# EAGLE board SISTEM MINIMUM ATMEGA16 MODEL 2 (EAGLE 5.06)
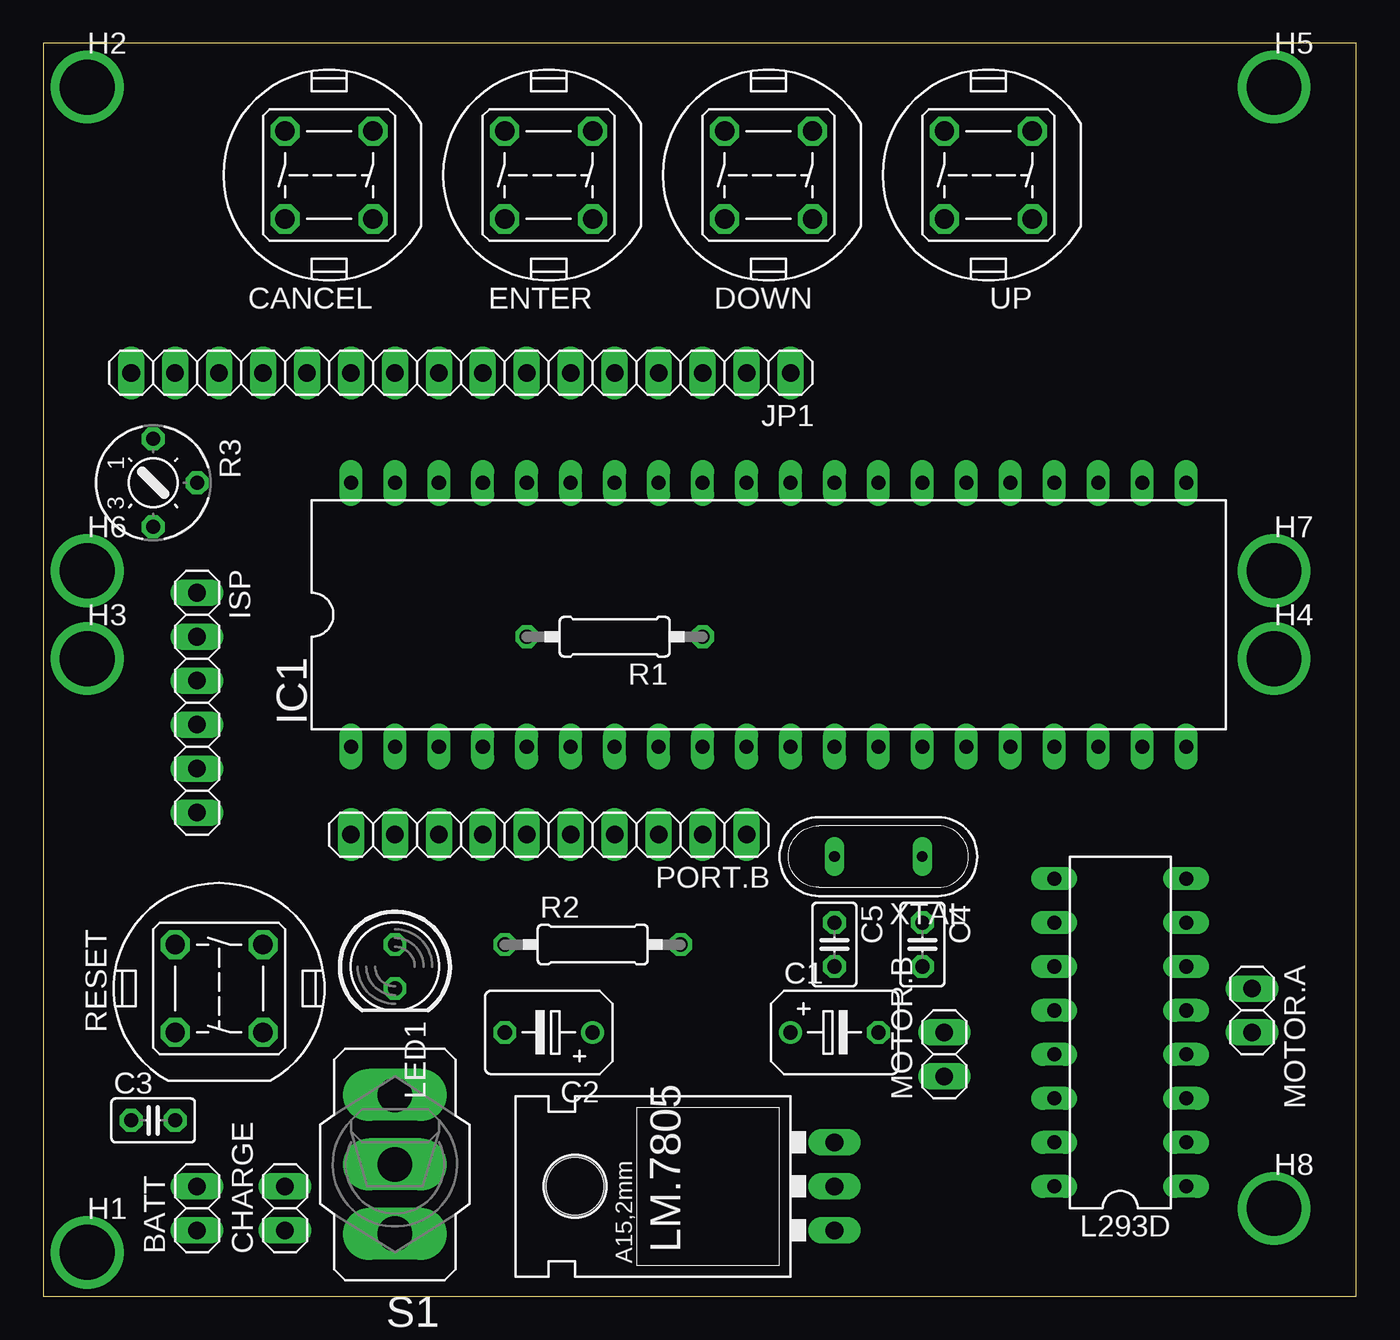
[diagram p0: board, top side]
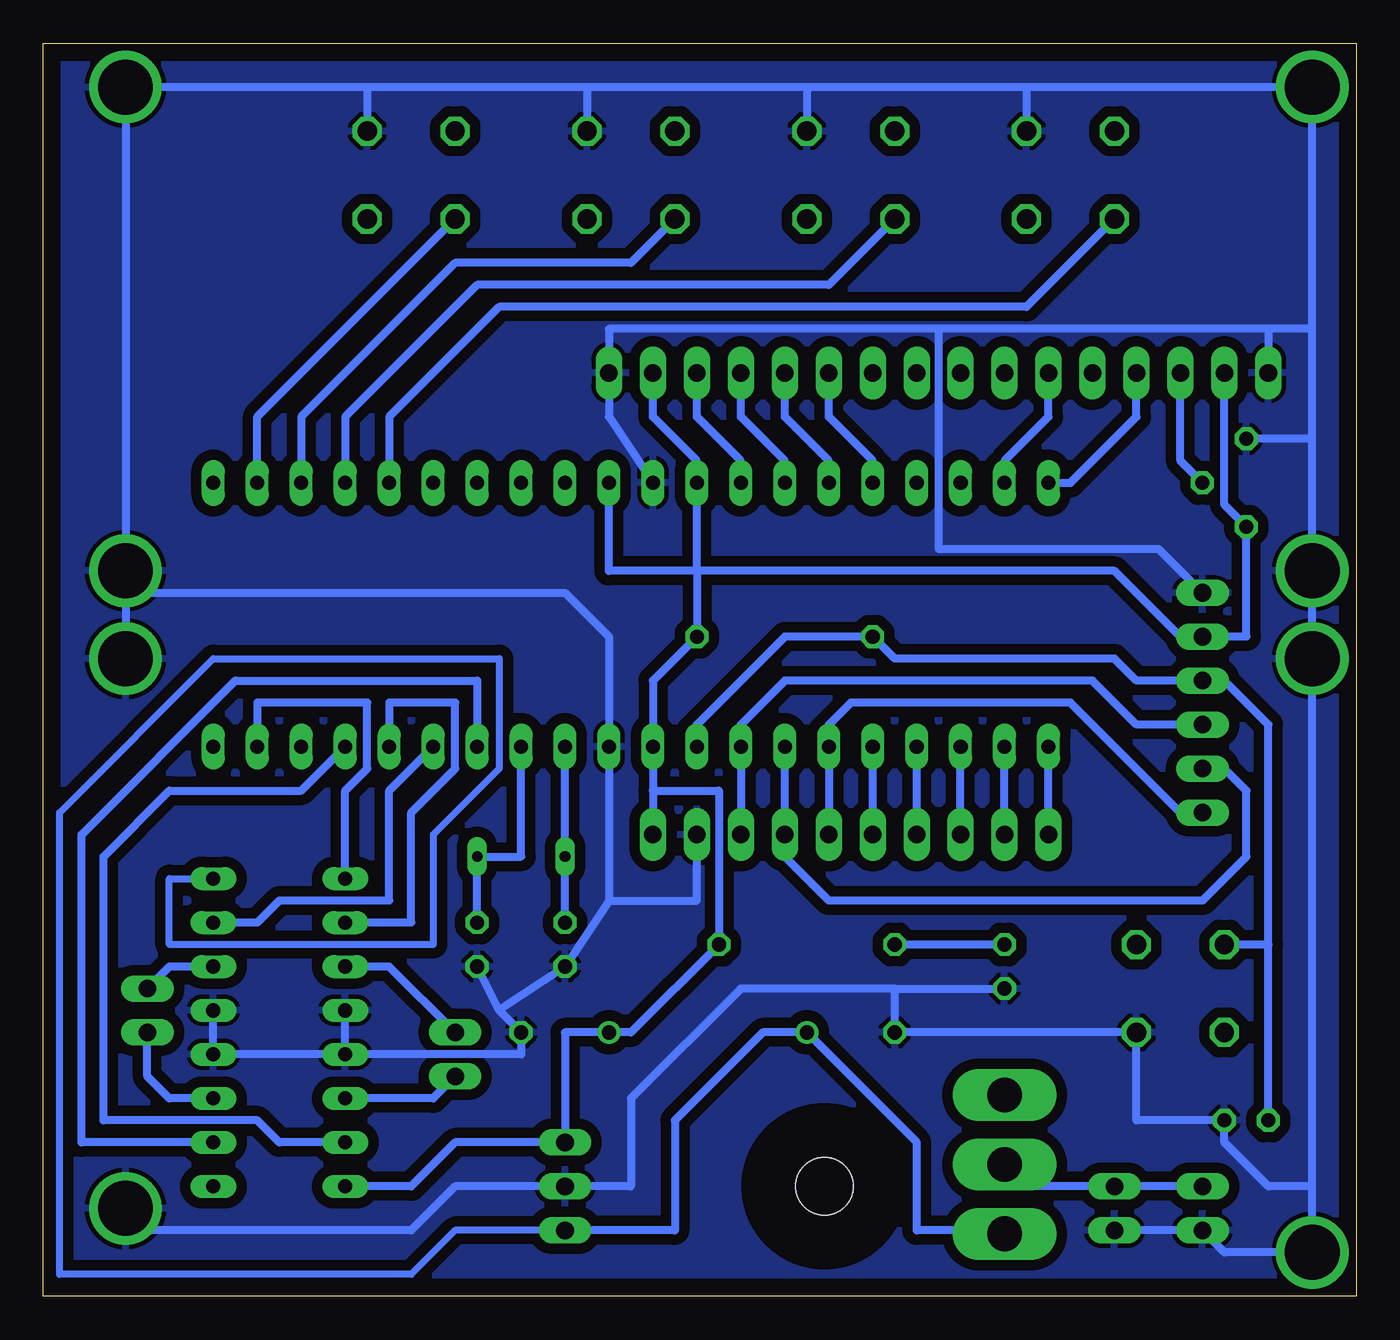
[diagram p1: board, bottom side, seen from below]

Size 75.87 x 72.38 mm. Coordinates in mm from the lower left corner, seen from the top.
Outline: 0,0 75.87,0 75.87,72.38 0,72.38 0,0
Copper layers (1*16): Top 0.035mm / dielectric 1.5mm / Bottom 0.035mm
Design rules "default *": minimum track width 18mil, minimum drill 24mil, track to track 10mil, track to pad 10mil, pad to pad 10mil, via to via 10mil, smd to smd 8mil, copper to edge 40mil, drill to drill 8mil, minimum pad ring 10mil, minimum via ring 8mil, stop-mask expansion 4mil, vias tented up to drill 0mil, thermal gap 10mil

## Footprints (pad centres in the part's own frame; a part is rotated, then mirrored left to right if it is on the bottom)
1X02 = drill 1.016 long: 1 -1.27,0; 2 1.27,0
B45181B = drill 0.813 round: + -2.54,0 | drill 0.813 octagon: - 2.54,0
C025-025X050 = drill 0.813 octagon: 1 -1.27,0; 2 1.27,0
DTE6 = drill 1.118 octagon: 1 -2.54,2.54; 2 2.54,2.54; 3 2.54,-2.54; 4 -2.54,-2.54
PAD_0.1250 = drill 3.175 pad 3.175 round: 1 0,0
DIL40 = drill 0.813 long: 1 -24.13,-7.62; 2 -21.59,-7.62; 3 -19.05,-7.62; 4 -16.51,-7.62; 5 -13.97,-7.62; 6 -11.43,-7.62; 7 -8.89,-7.62; 8 -6.35,-7.62; 9 -3.81,-7.62; 10 -1.27,-7.62; 11 1.27,-7.62; 12 3.81,-7.62; 13 6.35,-7.62; 14 8.89,-7.62; 15 11.43,-7.62; 16 13.97,-7.62; 17 16.51,-7.62; 18 19.05,-7.62; 19 21.59,-7.62; 20 24.13,-7.62; 21 24.13,7.62; 22 21.59,7.62; 23 19.05,7.62; 24 16.51,7.62; 25 13.97,7.62; 26 11.43,7.62; 27 8.89,7.62; 28 6.35,7.62; 29 3.81,7.62; 30 1.27,7.62; 31 -1.27,7.62; 32 -3.81,7.62; 33 -6.35,7.62; 34 -8.89,7.62; 35 -11.43,7.62; 36 -13.97,7.62; 37 -16.51,7.62; 38 -19.05,7.62; 39 -21.59,7.62; 40 -24.13,7.62
1X06 = drill 1.016 long: 1 -6.35,0; 2 -3.81,0; 3 -1.27,0; 4 1.27,0; 5 3.81,0; 6 6.35,0
1X16 = drill 1.016 long: 1 -19.05,0; 2 -16.51,0; 3 -13.97,0; 4 -11.43,0; 5 -8.89,0; 6 -6.35,0; 7 -3.81,0; 8 -1.27,0; 9 1.27,0; 10 3.81,0; 11 6.35,0; 12 8.89,0; 13 11.43,0; 14 13.97,0; 15 16.51,0; 16 19.05,0
DIL16 = drill 0.813 long: 1 -8.89,-3.81; 2 -6.35,-3.81; 3 -3.81,-3.81; 4 -1.27,-3.81; 5 1.27,-3.81; 6 3.81,-3.81; 7 6.35,-3.81; 8 8.89,-3.81; 9 8.89,3.81; 10 6.35,3.81; 11 3.81,3.81; 12 1.27,3.81; 13 -1.27,3.81; 14 -3.81,3.81; 15 -6.35,3.81; 16 -8.89,3.81
LED5MM = drill 0.813 octagon: A -1.27,0; K 1.27,0
78XXL = drill 1.016 long: GND 0,-3.81; IN -2.54,-3.81; OUT 2.54,-3.81 | hole 3.302: 0,11.176
1X10 = drill 1.016 long: 1 -11.43,0; 2 -8.89,0; 3 -6.35,0; 4 -3.81,0; 5 -1.27,0; 6 1.27,0; 7 3.81,0; 8 6.35,0; 9 8.89,0; 10 11.43,0
0207/10 = drill 0.813 octagon: 1 -5.08,0; 2 5.08,0
S75P = drill 0.813 octagon: A -2.54,0; E 2.54,0; S 0,2.54
320-916 = drill 2.007 long: 1 0,4.013; 2 0,0; 3 0,-4.013
QS = drill 0.61 long: 1 -2.54,0; 2 2.54,0

## Placement (x,y rotation side)
BATT  [1X02]  8.89,5.08 90 top
C1  [B45181B]  45.72,15.24 0 top
C2  [B45181B]  29.21,15.24 180 top
C3  [C025-025X050]  6.35,10.16 0 top
C4  [C025-025X050]  50.8,20.32 270 top
C5  [C025-025X050]  45.72,20.32 270 top
CANCEL  [DTE6]  16.51,64.77 180 top
CHARGE  [1X02]  13.97,5.08 90 top
DOWN  [DTE6]  41.91,64.77 180 top
ENTER  [DTE6]  29.21,64.77 180 top
H1  SPECIAL_DRILL_0.1250  [PAD_0.1250]  2.54,2.54 0 top
H2  SPECIAL_DRILL_0.1250  [PAD_0.1250]  2.54,69.85 0 top
H3  SPECIAL_DRILL_0.1250  [PAD_0.1250]  2.54,36.83 0 top
H4  SPECIAL_DRILL_0.1250  [PAD_0.1250]  71.12,36.83 0 top
H5  SPECIAL_DRILL_0.1250  [PAD_0.1250]  71.12,69.85 0 top
H6  SPECIAL_DRILL_0.1250  [PAD_0.1250]  2.54,41.91 0 top
H7  SPECIAL_DRILL_0.1250  [PAD_0.1250]  71.12,41.91 0 top
H8  SPECIAL_DRILL_0.1250  [PAD_0.1250]  71.12,5.08 0 top
IC1  MEGA16  [DIL40]  41.91,39.37 0 top
ISP  [1X06]  8.89,34.29 270 top
JP1  [1X16]  24.13,53.34 180 top
L293D  [DIL16]  62.23,15.24 90 top
LED1  [LED5MM]  20.32,19.05 270 top
LM.7805  [78XXL]  41.91,6.35 90 top
MOTOR.A  [1X02]  69.85,16.51 270 top
MOTOR.B  [1X02]  52.07,13.97 90 top
PORT.B  [1X10]  29.21,26.67 180 top
R1  [0207/10]  33.02,38.1 180 top
R2  [0207/10]  31.75,20.32 0 top
R3  [S75P]  6.35,46.99 270 top
RESET  [DTE6]  10.16,17.78 90 top
S1  [320-916]  20.32,7.62 180 top
UP  [DTE6]  54.61,64.77 180 top
XTAL  [QS]  48.26,25.4 180 top

## Library data of the parts
BATT CHARGE ISP JP1 MOTOR.A MOTOR.B PORT.B = pinhead
C1-C5 R1 R2 = resistor
CANCEL DOWN ENTER RESET UP = switch-misc
H1-H8 = special-drill
IC1 = atmel
L293D = ic-package
LED1 = led
LM.7805 = v-reg
R3 = pot
S1 = switch
XTAL = special

## Nets
GND: BATT.1 C1.- C2.- C3.2 C4.2 C5.2 CANCEL.4 CHARGE.1 DOWN.4 ENTER.4 H1.1 H2.1 H3.1 H4.1 H5.1 H6.1 H7.1 H8.1 IC1.11 IC1.31 ISP.1 JP1.1 JP1.16 L293D.4 L293D.5 L293D.12 L293D.13 LED1.K LM.7805.GND PORT.B.2 R3.A RESET.4 UP.4
N$1: IC1.4 PORT.B.7
N$2: DOWN.2 IC1.23
N$3: C2.+ L293D.8 LM.7805.IN S1.1
N$4: BATT.2 CHARGE.2 S1.2
N$6: LED1.A R2.1
N$7: C4.1 IC1.13 XTAL.1
N$8: C5.1 IC1.12 XTAL.2
N$9: C3.1 IC1.9 ISP.3 R1.2 RESET.2
N$10: ENTER.2 IC1.24
N$11: IC1.22 UP.2
N$12: IC1.40 JP1.13
N$13: IC1.39 JP1.11
N$14: IC1.33 JP1.3
N$15: IC1.34 JP1.4
N$16: IC1.35 JP1.5
N$17: IC1.36 JP1.6
N$20: IC1.7 ISP.5 PORT.B.4
N$21: L293D.6 MOTOR.A.1
N$22: L293D.3 MOTOR.A.2
N$23: L293D.11 MOTOR.B.2
N$24: IC1.5 PORT.B.6
N$26: IC1.8 ISP.4 PORT.B.3
N$28: IC1.6 ISP.6 PORT.B.5
N$31: JP1.14 R3.S
N$33: CANCEL.2 IC1.25
N$34: L293D.14 MOTOR.B.1
N$39: IC1.18
N$40: IC1.17 L293D.15
N$42: IC1.15 L293D.7
N$43: IC1.14 L293D.2
N$44: IC1.19 L293D.9
N$49: IC1.16 L293D.10
N$56: IC1.3 PORT.B.8
N$57: IC1.2 PORT.B.9
N$58: IC1.1 PORT.B.10
UP: C1.+ IC1.10 IC1.30 IC1.32 ISP.2 JP1.2 JP1.15 L293D.16 LM.7805.OUT PORT.B.1 R1.1 R2.2 R3.E

## Tracks (layer width: path | path; a pad name or v marks a point on that pad's centre or on a via)
GND
  Bottom 0.457: CHARGE.1 BATT.1 7.62,2.54 H1.1 2.54,5.08 | 26.67,17.78 C2.- RESET.4 12.7,10.16 C3.2 7.62,8.89 5.08,6.35 2.54,6.35 2.54,5.08 | 26.67,17.78 LED1.K | 26.67,17.78 35.56,17.78 41.91,11.43 41.91,6.35 LM.7805.GND 52.07,6.35 54.61,3.81 72.39,3.81 H8.1 | IC1.31 43.18,50.8 JP1.1 43.18,55.88 24.13,55.88 | 5.08,55.88 JP1.16 | 2.54,55.88 5.08,55.88 | 24.13,55.88 24.13,43.18 11.43,43.18 ISP.1 | 5.08,55.88 24.13,55.88 | L293D.13 L293D.12 | L293D.5 L293D.4 L293D.13 | 49.53,16.51 C4.2 | 49.53,16.51 C1.- 48.26,13.97 L293D.13 | 49.53,16.51 C5.2 43.18,22.86 | 43.18,22.86 IC1.11 43.18,38.1 45.72,40.64 71.12,40.64 | PORT.B.2 38.1,22.86 43.18,22.86 | 71.12,40.64 H7.1 H5.1 57.15,69.85 | 71.12,40.64 H4.1 | 19.05,69.85 CANCEL.4 | 19.05,69.85 H2.1 2.54,55.88 | 31.75,69.85 ENTER.4 | 19.05,69.85 31.75,69.85 | 44.45,69.85 DOWN.4 | 31.75,69.85 44.45,69.85 | 44.45,69.85 57.15,69.85 | 57.15,69.85 UP.4 | 2.54,49.53 2.54,55.88 | 2.54,5.08 H3.1 H6.1 2.54,49.53 | 2.54,49.53 R3.A
  pour Bottom (isolate 0.61): 0,72.39 76.2,72.39 76.2,0 0,0
N$1
  Bottom 0.457: PORT.B.7 IC1.4
N$2
  Bottom 0.457: IC1.23 60.96,50.8 52.07,59.69 41.91,59.69 DOWN.2
N$3
  Bottom 0.406: L293D.8 68.58,24.13 68.58,20.32 53.34,20.32 53.34,26.67 49.53,30.48 49.53,36.83 66.04,36.83 74.93,27.94 74.93,1.27 54.61,1.27 52.07,3.81 LM.7805.IN
  Bottom 0.457: LM.7805.IN 39.37,3.81 39.37,10.16 34.29,15.24 C2.+ 25.4,8.89 25.4,3.81 22.86,3.81 | 22.86,3.81 21.59,3.81 | S1.1 22.86,3.81
N$4
  Bottom 0.457: BATT.2 CHARGE.2 19.05,6.35 S1.2
N$6
  Bottom 0.457: LED1.A R2.1
N$7
  Bottom 0.457: C4.1 XTAL.1 48.26,25.4 IC1.13
N$8
  Bottom 0.457: C5.1 XTAL.2 IC1.12
N$9
  Bottom 0.457: 5.08,20.32 5.08,33.02 7.62,35.56 ISP.3 12.7,35.56 13.97,36.83 26.67,36.83 R1.2 33.02,38.1 38.1,33.02 IC1.9 | 5.08,20.32 RESET.2 | C3.1 5.08,20.32
N$10
  Bottom 0.457: IC1.24 58.42,50.8 50.8,58.42 30.48,58.42 ENTER.2
N$11
  Bottom 0.457: IC1.22 63.5,50.8 UP.2
N$12
  Bottom 0.457: IC1.40 16.51,46.99 12.7,50.8 JP1.13
N$13
  Bottom 0.457: IC1.39 20.32,48.26 17.78,50.8 JP1.11
N$14
  Bottom 0.457: IC1.33 35.56,48.26 38.1,50.8 JP1.3
N$15
  Bottom 0.457: IC1.34 33.02,48.26 35.56,50.8 JP1.4
N$16
  Bottom 0.457: IC1.35 30.48,48.26 33.02,50.8 JP1.5
N$17
  Bottom 0.457: IC1.36 27.94,48.26 30.48,50.8 JP1.6
N$20
  Bottom 0.457: IC1.7 PORT.B.4 33.02,25.4 30.48,22.86 8.89,22.86 6.35,25.4 6.35,29.21 7.62,30.48 ISP.5
N$21
  Bottom 0.457: L293D.6 68.58,19.05 MOTOR.A.1
N$22
  Bottom 0.457: L293D.3 68.58,11.43 69.85,12.7 MOTOR.A.2
N$23
  Bottom 0.457: L293D.11 55.88,19.05 MOTOR.B.2
N$24
  Bottom 0.457: PORT.B.6 IC1.5
N$26
  Bottom 0.457: PORT.B.3 IC1.8 35.56,33.02 33.02,35.56 15.24,35.56 12.7,33.02 ISP.4
N$28
  Bottom 0.457: PORT.B.5 IC1.6 30.48,33.02 29.21,34.29 16.51,34.29 10.16,27.94 ISP.6
N$31
  Bottom 0.457: JP1.14 10.16,48.26 R3.S
N$33
  Bottom 0.457: IC1.25 55.88,50.8 49.53,57.15 19.05,57.15 CANCEL.2
N$34
  Bottom 0.457: MOTOR.B.1 53.34,11.43 L293D.14
N$40
  Bottom 0.457: L293D.15 62.23,8.89 63.5,10.16 72.39,10.16 72.39,25.4 68.58,29.21 60.96,29.21 IC1.17
N$42
  Bottom 0.457: IC1.15 55.88,29.21 55.88,22.86 62.23,22.86 63.5,21.59 L293D.7
N$43
  Bottom 0.457: IC1.14 50.8,35.56 64.77,35.56 73.66,26.67 73.66,8.89 L293D.2
N$44
  Bottom 0.457: L293D.9 58.42,29.21 57.15,30.48 57.15,34.29 63.5,34.29 IC1.19
N$49
  Bottom 0.457: L293D.10 54.61,21.59 54.61,27.94 52.07,30.48 52.07,34.29 55.88,34.29 IC1.16
N$56
  Bottom 0.457: PORT.B.8 IC1.3
N$57
  Bottom 0.457: PORT.B.9 IC1.2
N$58
  Bottom 0.457: PORT.B.10 IC1.1
UP
  Bottom 0.457: L293D.16 54.61,6.35 52.07,8.89 LM.7805.OUT 45.72,15.24 C1.+ 41.91,15.24 R2.2 36.83,29.21 40.64,29.21 | JP1.15 7.62,45.72 R3.E 6.35,38.1 ISP.2 10.16,38.1 13.97,41.91 38.1,41.91 | JP1.2 40.64,50.8 38.1,48.26 IC1.32 38.1,41.91 | 40.64,29.21 PORT.B.1 | 40.64,29.21 IC1.10 40.64,35.56 R1.1 38.1,41.91 | 38.1,41.91 43.18,41.91 IC1.30